# EAGLE board nodeTestPanel (EAGLE 9.0.1), part 1 of 3
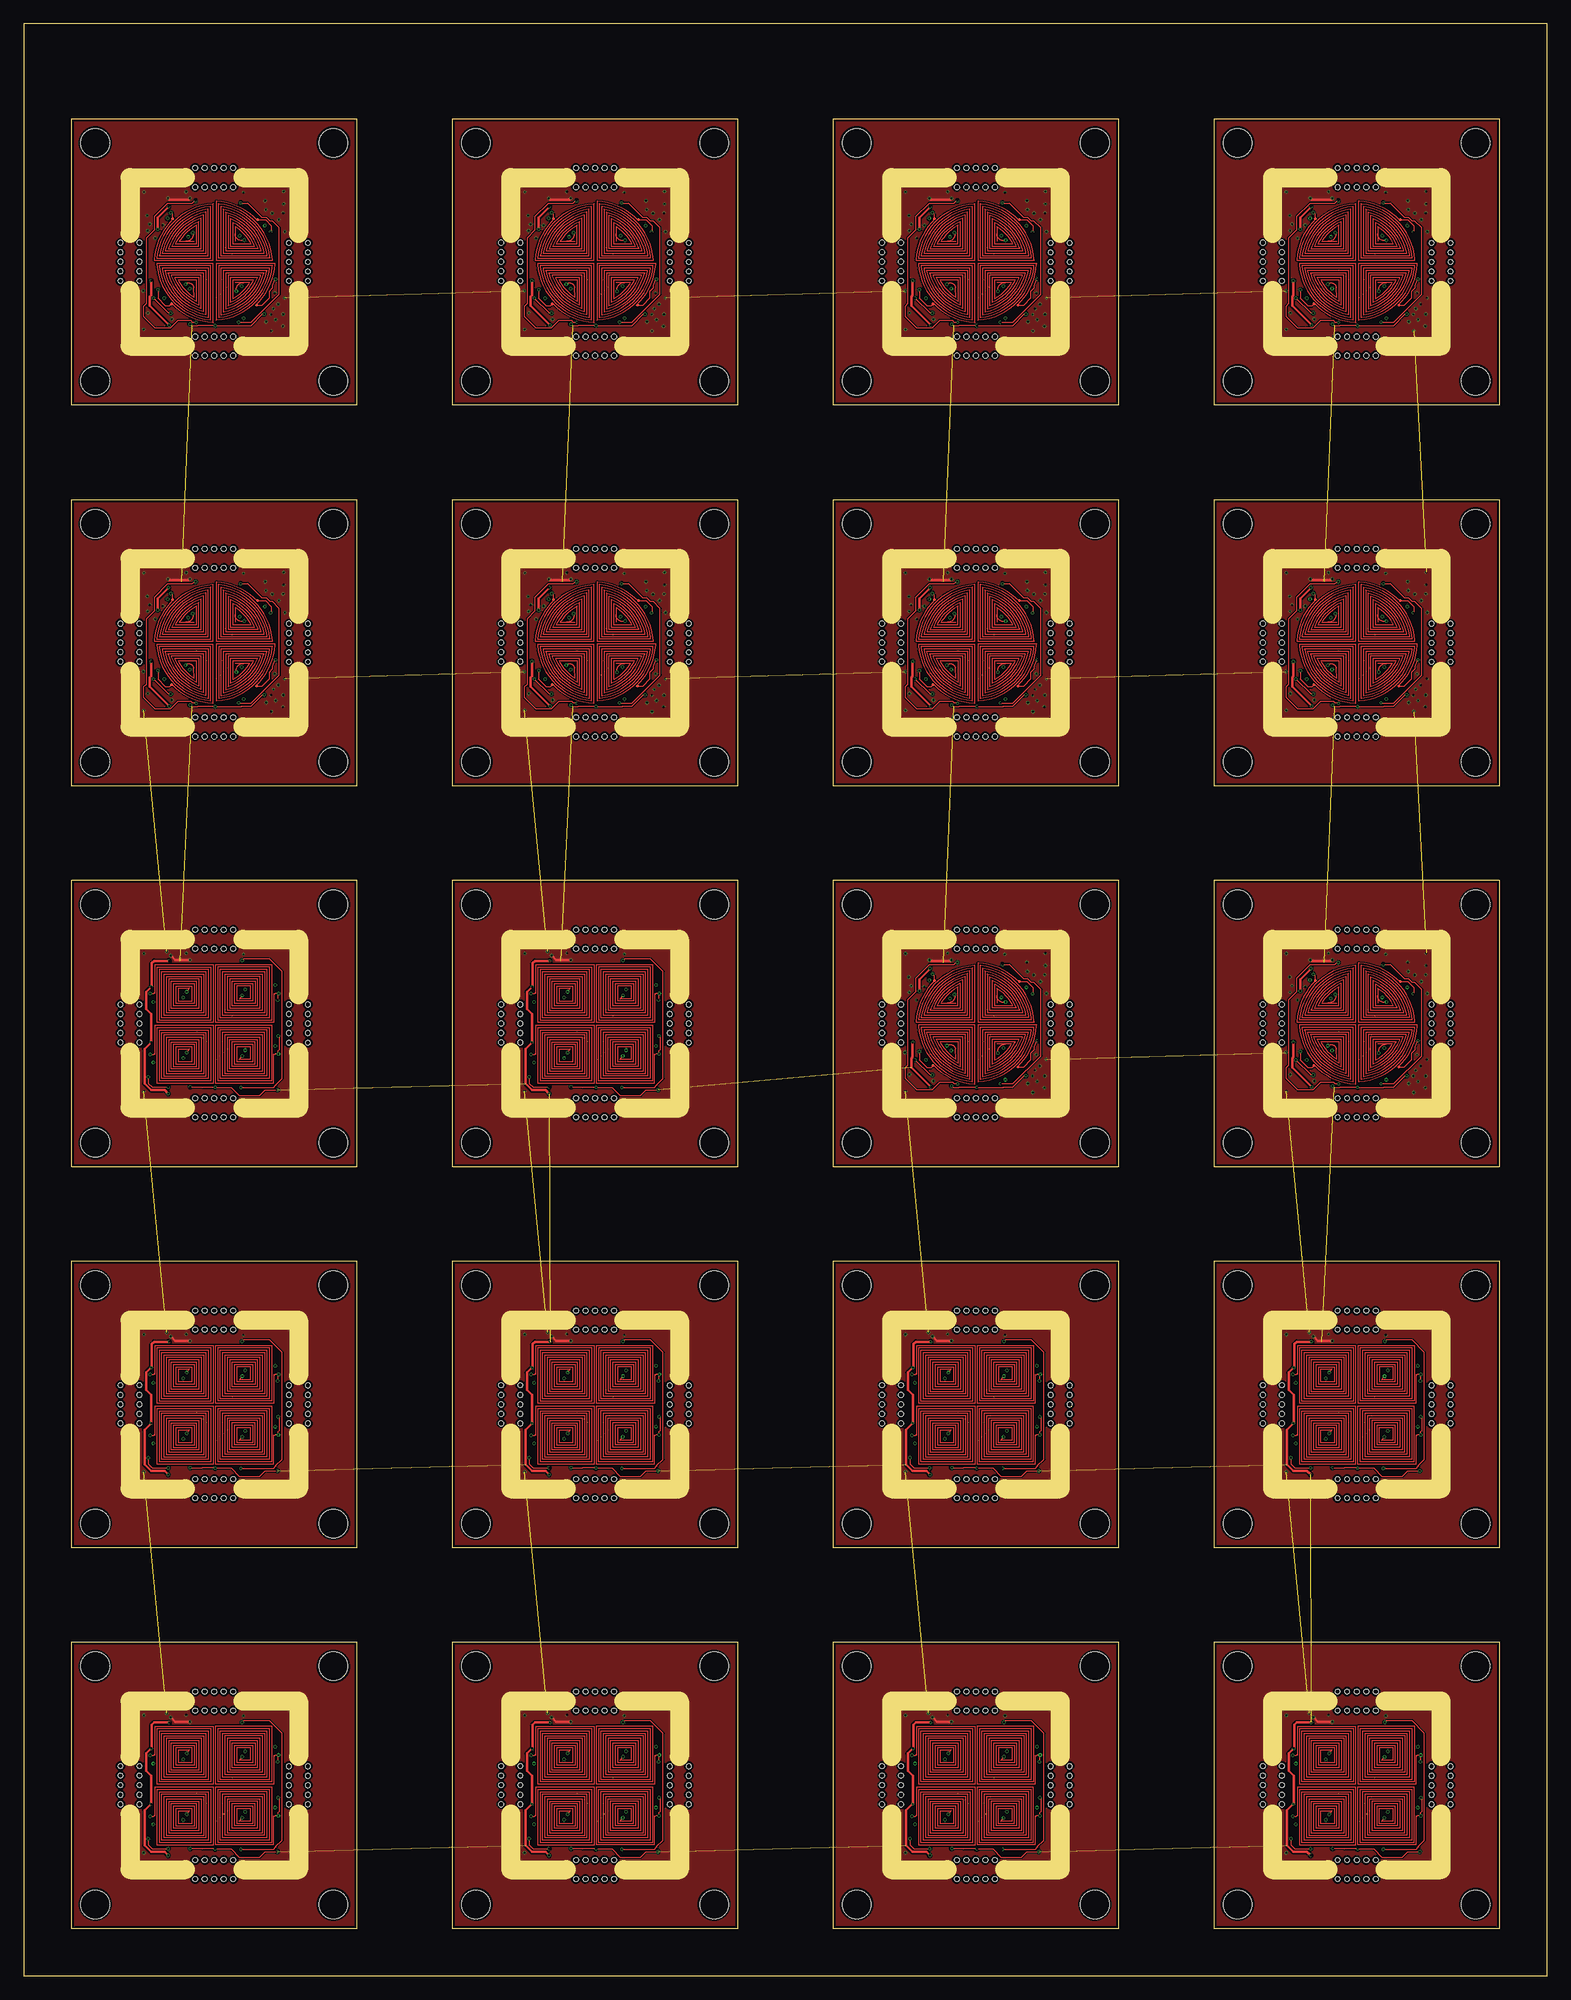
[diagram p0: board, top side]
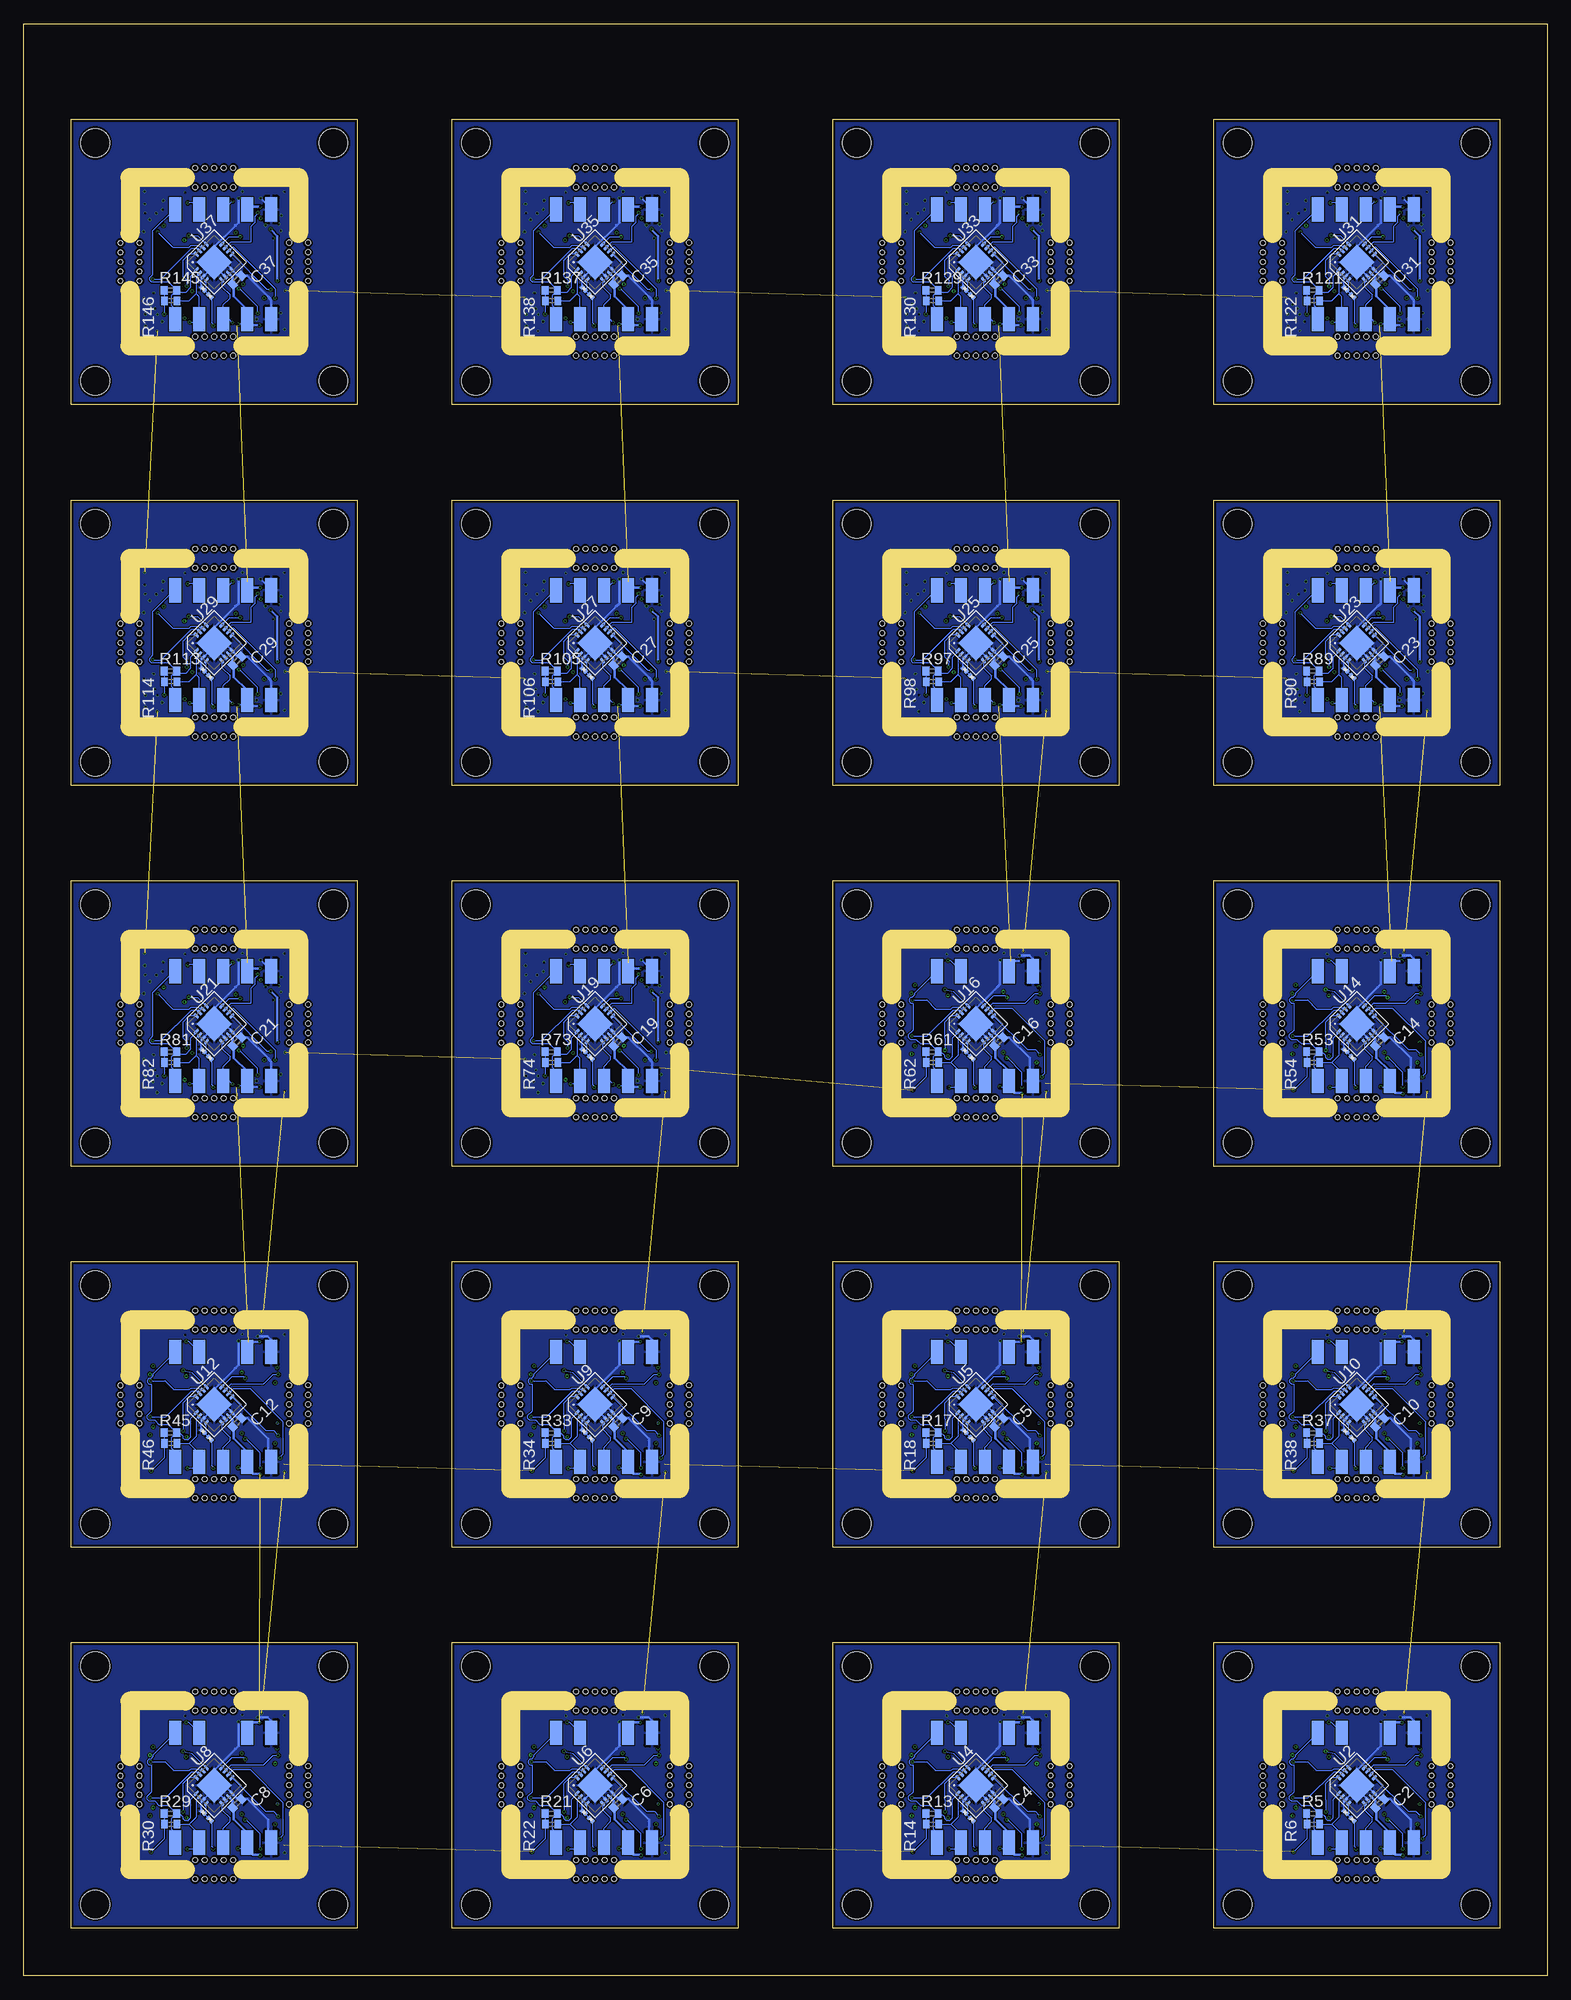
[diagram p1: board, bottom side, seen from below]

Size 160 x 205 mm. Coordinates in mm from the lower left corner, seen from the top.
Outline: 0,0 160,0 160,205 0,205 0,0
Outline: 5,5 35,5 35,35 5,35 5,5
Outline: 45,5 75,5 75,35 45,35 45,5
Outline: 85,5 115,5 115,35 85,35 85,5
Outline: 125,5 155,5 155,35 125,35 125,5
Outline: 5,45 35,45 35,75 5,75 5,45
Outline: 45,45 75,45 75,75 45,75 45,45
Outline: 85,45 115,45 115,75 85,75 85,45
Outline: 125,45 155,45 155,75 125,75 125,45
Outline: 5,85 35,85 35,115 5,115 5,85
Outline: 45,85 75,85 75,115 45,115 45,85
Outline: 85,85 115,85 115,115 85,115 85,85
Outline: 125,85 155,85 155,115 125,115 125,85
Outline: 5,125 35,125 35,155 5,155 5,125
Outline: 45,125 75,125 75,155 45,155 45,125
Outline: 85,125 115,125 115,155 85,155 85,125
Outline: 125,125 155,125 155,155 125,155 125,125
Outline: 5,165 35,165 35,195 5,195 5,165
Outline: 45,165 75,165 75,195 45,195 45,165
Outline: 85,165 115,165 115,195 85,195 85,165
Outline: 125,165 155,165 155,195 125,195 125,165
Copper layers (1*2*15*16): Top 0.035mm / dielectric 1.5mm / Route2 0.035mm / dielectric 0.15mm / Route15 0.035mm / dielectric 0.2mm / Bottom 0.035mm
Design rules "singleNode": minimum track width 0.125mm, minimum drill 0.2mm, track to track 0.125mm, track to pad 0.125mm, pad to pad 0.125mm, via to via 0.125mm, smd to smd 0.125mm, copper to edge 0.25mm, drill to drill 0.45mm, minimum pad ring 0.06mm, minimum via ring 0.05mm, stop-mask expansion 4mil, vias tented up to drill 0mil, thermal gap 10mil
Holes 3 mm at 7.5,7.5 32.5,7.5 7.5,32.5 32.5,32.5 47.5,7.5 72.5,7.5 47.5,32.5 72.5,32.5 87.5,7.5 112.5,7.5 87.5,32.5 112.5,32.5 127.5,7.5 152.5,7.5 127.5,32.5 152.5,32.5 7.5,47.5 32.5,47.5 7.5,72.5 32.5,72.5 47.5,47.5 72.5,47.5 47.5,72.5 72.5,72.5 87.5,47.5 112.5,47.5 87.5,72.5 112.5,72.5 127.5,47.5 152.5,47.5 127.5,72.5 152.5,72.5 7.5,87.5 32.5,87.5 7.5,112.5 32.5,112.5 47.5,87.5 72.5,87.5 47.5,112.5 72.5,112.5 87.5,87.5 112.5,87.5 87.5,112.5 112.5,112.5 127.5,87.5 152.5,87.5 127.5,112.5 152.5,112.5 7.5,127.5 32.5,127.5 7.5,152.5 32.5,152.5 47.5,127.5 72.5,127.5 47.5,152.5 72.5,152.5 87.5,127.5 112.5,127.5 87.5,152.5 112.5,152.5 127.5,127.5 152.5,127.5 127.5,152.5 152.5,152.5 7.5,167.5 32.5,167.5 7.5,192.5 32.5,192.5 47.5,167.5 72.5,167.5 47.5,192.5 72.5,192.5 87.5,167.5 112.5,167.5 87.5,192.5 112.5,192.5 127.5,167.5 152.5,167.5 127.5,192.5 152.5,192.5
Holes 0.5 mm at 18,27.85 19,27.85 20,27.85 21,27.85 22,27.85 18,29.85 19,29.85 20,29.85 21,29.85 22,29.85 12.14,18.01 12.14,19.01 12.14,20.01 12.14,21.01 12.14,22.01 10.14,18.01 10.14,19.01 10.14,20.01 10.14,21.01 10.14,22.01 29.85,18 29.85,19 29.85,20 29.85,21 29.85,22 27.85,18 27.85,19 27.85,20 27.85,21 27.85,22 18,10.15 19,10.15 20,10.15 21,10.15 22,10.15 18,12.15 19,12.15 20,12.15 21,12.15 22,12.15 58,27.85 59,27.85 60,27.85 61,27.85 62,27.85 58,29.85 59,29.85 60,29.85 61,29.85 62,29.85 52.14,18.01 52.14,19.01 52.14,20.01 52.14,21.01 52.14,22.01 50.14,18.01 50.14,19.01 50.14,20.01 50.14,21.01 50.14,22.01 69.85,18 69.85,19 69.85,20 69.85,21 69.85,22 67.85,18 67.85,19 67.85,20 67.85,21 67.85,22 58,10.15 59,10.15 60,10.15 61,10.15 62,10.15 58,12.15 59,12.15 60,12.15 61,12.15 62,12.15 98,27.85 99,27.85 100,27.85 101,27.85 102,27.85 98,29.85 99,29.85 100,29.85 101,29.85 102,29.85 92.14,18.01 92.14,19.01 92.14,20.01 92.14,21.01 92.14,22.01 90.14,18.01 90.14,19.01 90.14,20.01 90.14,21.01 90.14,22.01 109.85,18 109.85,19 109.85,20 109.85,21 109.85,22 107.85,18 107.85,19 107.85,20 107.85,21 107.85,22 98,10.15 99,10.15 100,10.15 101,10.15 102,10.15 98,12.15 99,12.15 100,12.15 101,12.15 102,12.15 138,27.85 139,27.85 140,27.85 141,27.85 142,27.85 138,29.85 139,29.85 140,29.85 141,29.85 142,29.85 132.14,18.01 132.14,19.01 132.14,20.01 132.14,21.01 132.14,22.01 130.14,18.01 130.14,19.01 130.14,20.01 130.14,21.01 130.14,22.01 149.85,18 149.85,19 149.85,20 149.85,21 149.85,22 147.85,18 147.85,19 147.85,20 147.85,21 147.85,22 138,10.15 139,10.15 140,10.15 141,10.15 142,10.15 138,12.15 139,12.15 140,12.15 141,12.15 142,12.15 18,67.85 19,67.85 20,67.85 21,67.85 22,67.85 18,69.85 19,69.85 20,69.85 21,69.85 22,69.85 12.14,58.01 12.14,59.01 12.14,60.01 12.14,61.01 12.14,62.01 10.14,58.01 10.14,59.01 10.14,60.01 10.14,61.01 10.14,62.01 29.85,58 29.85,59 29.85,60 29.85,61 29.85,62 27.85,58 27.85,59 27.85,60 27.85,61 27.85,62 18,50.15 19,50.15 20,50.15 21,50.15 22,50.15 18,52.15 19,52.15 20,52.15 21,52.15 22,52.15 58,67.85 59,67.85 60,67.85 61,67.85 62,67.85 58,69.85 59,69.85 60,69.85 61,69.85 62,69.85 52.14,58.01 52.14,59.01 52.14,60.01 52.14,61.01 52.14,62.01 50.14,58.01 50.14,59.01 50.14,60.01 50.14,61.01 50.14,62.01 69.85,58 69.85,59 69.85,60 69.85,61 69.85,62 67.85,58 67.85,59 67.85,60 67.85,61 67.85,62 58,50.15 59,50.15 60,50.15 61,50.15 62,50.15 58,52.15 59,52.15 60,52.15 61,52.15 62,52.15 98,67.85 99,67.85 100,67.85 101,67.85 102,67.85 98,69.85 99,69.85 100,69.85 101,69.85 102,69.85 92.14,58.01 92.14,59.01 92.14,60.01 92.14,61.01 92.14,62.01 90.14,58.01 90.14,59.01 90.14,60.01 90.14,61.01 90.14,62.01 109.85,58 109.85,59 109.85,60 109.85,61 109.85,62 107.85,58 107.85,59 107.85,60 107.85,61 107.85,62 98,50.15 99,50.15 100,50.15 101,50.15 102,50.15 98,52.15 99,52.15 100,52.15 101,52.15 102,52.15 138,67.85 139,67.85 140,67.85 141,67.85 142,67.85 138,69.85 139,69.85 140,69.85 141,69.85 142,69.85 132.14,58.01 132.14,59.01 132.14,60.01 132.14,61.01 132.14,62.01 130.14,58.01 130.14,59.01 130.14,60.01 130.14,61.01 130.14,62.01 149.85,58 149.85,59 149.85,60 149.85,61 149.85,62 147.85,58 147.85,59 147.85,60 147.85,61 147.85,62 138,50.15 139,50.15 140,50.15 141,50.15 142,50.15 138,52.15 139,52.15 140,52.15 141,52.15 142,52.15 18,107.85 19,107.85 20,107.85 21,107.85 22,107.85 18,109.85 19,109.85 20,109.85 21,109.85 22,109.85 12.14,98.01 12.14,99.01 12.14,100.01 12.14,101.01 12.14,102.01 10.14,98.01 10.14,99.01 10.14,100.01 10.14,101.01 10.14,102.01 29.85,98 29.85,99 29.85,100 29.85,101 29.85,102 27.85,98 27.85,99 27.85,100 27.85,101 27.85,102 18,90.15 19,90.15 20,90.15 21,90.15 22,90.15 18,92.15 19,92.15 20,92.15 21,92.15 22,92.15 58,107.85 59,107.85 60,107.85 61,107.85 62,107.85 58,109.85 59,109.85 60,109.85 61,109.85 62,109.85 52.14,98.01 52.14,99.01 52.14,100.01 52.14,101.01 52.14,102.01 50.14,98.01 50.14,99.01 50.14,100.01 50.14,101.01 50.14,102.01 69.85,98 69.85,99 69.85,100 69.85,101 69.85,102 67.85,98 67.85,99 67.85,100 67.85,101 67.85,102 58,90.15 59,90.15 60,90.15 61,90.15 62,90.15 58,92.15 59,92.15 60,92.15 61,92.15 62,92.15 98,107.85 99,107.85 100,107.85 101,107.85 102,107.85 98,109.85 99,109.85 100,109.85 101,109.85 102,109.85 92.14,98.01 92.14,99.01 92.14,100.01 92.14,101.01 92.14,102.01 90.14,98.01 90.14,99.01 90.14,100.01 90.14,101.01 90.14,102.01 109.85,98 109.85,99 109.85,100 109.85,101 109.85,102 107.85,98 107.85,99 107.85,100 107.85,101 107.85,102 98,90.15 99,90.15 100,90.15 101,90.15 102,90.15 98,92.15 99,92.15 100,92.15 101,92.15 102,92.15 138,107.85 139,107.85 140,107.85 141,107.85 142,107.85 138,109.85 139,109.85 140,109.85 141,109.85 142,109.85 132.14,98.01 132.14,99.01 132.14,100.01 132.14,101.01 132.14,102.01 130.14,98.01 130.14,99.01 130.14,100.01 130.14,101.01 130.14,102.01 149.85,98 149.85,99 149.85,100 149.85,101 149.85,102 147.85,98 147.85,99 147.85,100 147.85,101 147.85,102 138,90.15 139,90.15 140,90.15 141,90.15 142,90.15 138,92.15 139,92.15 140,92.15 141,92.15 142,92.15 18,147.85 19,147.85 20,147.85 21,147.85 22,147.85 18,149.85 19,149.85 20,149.85 21,149.85 22,149.85 12.14,138.01 12.14,139.01 12.14,140.01 12.14,141.01 12.14,142.01 10.14,138.01 10.14,139.01 10.14,140.01 10.14,141.01 10.14,142.01 29.85,138 29.85,139 29.85,140 29.85,141 29.85,142 27.85,138 27.85,139 27.85,140 27.85,141 27.85,142 18,130.15 19,130.15 20,130.15 21,130.15 22,130.15 18,132.15 19,132.15 20,132.15 21,132.15 22,132.15 58,147.85 59,147.85 60,147.85 61,147.85 62,147.85 58,149.85 59,149.85 60,149.85 61,149.85 62,149.85 52.14,138.01 52.14,139.01 52.14,140.01 52.14,141.01 52.14,142.01 50.14,138.01 50.14,139.01 50.14,140.01 50.14,141.01 50.14,142.01 69.85,138 69.85,139 69.85,140 69.85,141 69.85,142 67.85,138 67.85,139 67.85,140 67.85,141 67.85,142 58,130.15 59,130.15 60,130.15 61,130.15 62,130.15 58,132.15 59,132.15 60,132.15 61,132.15 62,132.15 98,147.85 99,147.85 100,147.85 101,147.85 102,147.85 98,149.85 99,149.85 100,149.85 101,149.85 102,149.85 92.14,138.01 92.14,139.01 92.14,140.01 92.14,141.01 92.14,142.01 90.14,138.01 90.14,139.01 90.14,140.01 90.14,141.01 90.14,142.01 109.85,138 109.85,139 109.85,140 109.85,141 109.85,142 107.85,138 107.85,139 107.85,140 107.85,141 107.85,142 98,130.15 99,130.15 100,130.15 101,130.15 102,130.15 98,132.15 99,132.15 100,132.15 101,132.15 102,132.15 138,147.85 139,147.85 140,147.85 141,147.85 142,147.85 138,149.85 139,149.85 140,149.85 141,149.85 142,149.85 132.14,138.01 132.14,139.01 132.14,140.01 132.14,141.01 132.14,142.01 130.14,138.01 130.14,139.01 130.14,140.01 130.14,141.01 130.14,142.01 149.85,138 149.85,139 149.85,140 149.85,141 149.85,142 147.85,138 147.85,139 147.85,140 147.85,141 147.85,142 138,130.15 139,130.15 140,130.15 141,130.15 142,130.15 138,132.15 139,132.15 140,132.15 141,132.15 142,132.15 18,187.85 19,187.85 20,187.85 21,187.85 22,187.85 18,189.85 19,189.85 20,189.85 21,189.85 22,189.85 12.14,178.01 12.14,179.01 12.14,180.01 12.14,181.01 12.14,182.01 10.14,178.01 10.14,179.01 10.14,180.01 10.14,181.01 10.14,182.01 29.85,178 29.85,179 29.85,180 29.85,181 29.85,182 27.85,178 27.85,179 27.85,180 27.85,181 27.85,182 18,170.15 19,170.15 20,170.15 21,170.15 22,170.15 18,172.15 19,172.15 20,172.15 21,172.15 22,172.15 58,187.85 59,187.85 60,187.85 61,187.85 62,187.85 58,189.85 59,189.85 60,189.85 61,189.85 62,189.85 52.14,178.01 52.14,179.01 52.14,180.01 52.14,181.01 52.14,182.01 50.14,178.01 50.14,179.01 50.14,180.01 50.14,181.01 50.14,182.01 69.85,178 69.85,179 69.85,180 69.85,181 69.85,182 67.85,178 67.85,179 67.85,180 67.85,181 67.85,182 58,170.15 59,170.15 60,170.15 61,170.15 62,170.15 58,172.15 59,172.15 60,172.15 61,172.15 62,172.15 98,187.85 99,187.85 100,187.85 101,187.85 102,187.85 98,189.85 99,189.85 100,189.85 101,189.85 102,189.85 92.14,178.01 92.14,179.01 92.14,180.01 92.14,181.01 92.14,182.01 90.14,178.01 90.14,179.01 90.14,180.01 90.14,181.01 90.14,182.01 109.85,178 109.85,179 109.85,180 109.85,181 109.85,182 107.85,178 107.85,179 107.85,180 107.85,181 107.85,182 98,170.15 99,170.15 100,170.15 101,170.15 102,170.15 98,172.15 99,172.15 100,172.15 101,172.15 102,172.15 138,187.85 139,187.85 140,187.85 141,187.85 142,187.85 138,189.85 139,189.85 140,189.85 141,189.85 142,189.85 132.14,178.01 132.14,179.01 132.14,180.01 132.14,181.01 132.14,182.01 130.14,178.01 130.14,179.01 130.14,180.01 130.14,181.01 130.14,182.01 149.85,178 149.85,179 149.85,180 149.85,181 149.85,182 147.85,178 147.85,179 147.85,180 147.85,181 147.85,182 138,170.15 139,170.15 140,170.15 141,170.15 142,170.15 138,172.15 139,172.15 140,172.15 141,172.15 142,172.15
Milling: 160 lines

## Footprints (pad centres in the part's own frame; a part is rotated, then mirrored left to right if it is on the bottom)
C0402 = smd 0.7 x 0.9: 1 -0.65,0; 2 0.65,0
SMD1,27-2,54 = smd 1.27 x 2.54: 1 0,0
R0402 = smd 0.7 x 0.9: 1 -0.65,0; 2 0.65,0
R0201 = smd 0.28 x 0.43: 1 -0.255,0; 2 0.255,0
WQFN-16 = smd 0.6 x 0.25: ADDR -1.9,-0.75; CLIKIN -1.9,-0.25; IN0A 1.9,-0.75; IN0B 1.9,-0.25; IN1A 1.9,0.25; IN1B 1.9,0.75; SCL -1.9,0.75; SDA -1.9,0.25 | smd 2.6 x 2.6: DAP 0,0 | smd 0.25 x 0.6: GND 0.75,-1.9; IN2A 0.75,1.9; IN2B 0.25,1.9; IN3A -0.25,1.9; IN3B -0.75,1.9; INTB -0.75,-1.9; SD -0.25,-1.9; VDD 0.25,-1.9
FAT_SQUARE = drill 0.2 pad 0.3: EXITCOIL0 -3.249,2.762; EXITCOIL1 -3.249,-3.618; EXITCOIL2 3.259,3.588; EXITCOIL3 3.249,-2.782; INCOIL0 -6.73,3.16; INCOIL1 -6.73,-3.22; INCOIL2 6.74,3.19; INCOIL3 6.73,-3.18; INT1_INT2_COIL0 -6.396,2.299; INT1_INT2_COIL1 -6.396,-4.081; INT1_INT2_COIL2 6.406,4.051; INT1_INT2_COIL3 6.396,-2.319; TOP_INT1_COIL0 -2.905,3.36; TOP_INT1_COIL1 -2.905,-3.02; TOP_INT1_COIL2 2.915,2.99; TOP_INT1_COIL3 2.905,-3.38
FAT_FAN = drill 0.2 pad 0.305: EXITCOIL0 -2.74,2.64; EXITCOIL1 -2.6,-2.81; EXITCOIL2B 2.67,2.78; EXITCOIL3 2.89,-2.55; INT1_INT2_COIL0 -4.91,4.6; INT1_INT2_COIL1 -5.26,-3.79; INT1_INT2_COIL2B 5.31,3.83; INT1_INT2_COIL3 3.09,-5.88; TOP_INT1_COIL0 -2.27,3.09; TOP_INT1_COIL1 -3.03,-2.31; TOP_INT1_COIL3 2.32,-3.06; TOP_INT1_COIL12B 3.12,2.3 | smd 0.25 x 0.25: INCOIL0 -4.37,4.56; INCOIL1 -4.5,-4.4; INCOIL2B 4.57,4.43; INCOIL3 4.43,-4.54

## Placement (x,y rotation side)
C2  10uF  [C0402]  17.6,18.1 45 bottom
C4  10uF  [C0402]  57.6,18.1 45 bottom
C5  10uF  [C0402]  57.6,58.1 45 bottom
C6  10uF  [C0402]  97.6,18.1 45 bottom
C8  10uF  [C0402]  137.6,18.1 45 bottom
C9  10uF  [C0402]  97.6,58.1 45 bottom
C10  10uF  [C0402]  17.6,58.1 45 bottom
C12  10uF  [C0402]  137.6,58.1 45 bottom
C14  10uF  [C0402]  17.6,98.1 45 bottom
C16  10uF  [C0402]  57.6,98.1 45 bottom
C19  10uF  [C0402]  97.6,98.1 45 bottom
C21  10uF  [C0402]  137.6,98.1 45 bottom
C23  10uF  [C0402]  17.6,138.1 45 bottom
C25  10uF  [C0402]  57.6,138.1 45 bottom
C27  10uF  [C0402]  97.6,138.1 45 bottom
C29  10uF  [C0402]  137.6,138.1 45 bottom
C31  10uF  [C0402]  17.6,178.1 45 bottom
C33  10uF  [C0402]  57.6,178.1 45 bottom
C35  10uF  [C0402]  97.6,178.1 45 bottom
C37  10uF  [C0402]  137.6,178.1 45 bottom
PAD8  WIREPADSMD1,27-254  [SMD1,27-2,54]  16.53,13.98 180 bottom
PAD11  WIREPADSMD1,27-254  [SMD1,27-2,54]  14.01,13.98 180 bottom
PAD12  WIREPADSMD1,27-254  [SMD1,27-2,54]  19.05,13.98 0 bottom
PAD13  WIREPADSMD1,27-254  [SMD1,27-2,54]  21.57,13.98 0 bottom
PAD14  WIREPADSMD1,27-254  [SMD1,27-2,54]  24.09,13.98 0 bottom
PAD15  WIREPADSMD1,27-254  [SMD1,27-2,54]  16.53,25.5 0 bottom
PAD16  WIREPADSMD1,27-254  [SMD1,27-2,54]  14.01,25.5 0 bottom
PAD17  WIREPADSMD1,27-254  [SMD1,27-2,54]  21.57,25.5 0 bottom
PAD18  WIREPADSMD1,27-254  [SMD1,27-2,54]  24.09,25.5 0 bottom
PAD28  WIREPADSMD1,27-254  [SMD1,27-2,54]  56.53,13.98 180 bottom
PAD29  WIREPADSMD1,27-254  [SMD1,27-2,54]  54.01,13.98 180 bottom
PAD30  WIREPADSMD1,27-254  [SMD1,27-2,54]  59.05,13.98 0 bottom
PAD31  WIREPADSMD1,27-254  [SMD1,27-2,54]  61.57,13.98 0 bottom
PAD32  WIREPADSMD1,27-254  [SMD1,27-2,54]  64.09,13.98 0 bottom
PAD33  WIREPADSMD1,27-254  [SMD1,27-2,54]  56.53,25.5 0 bottom
PAD34  WIREPADSMD1,27-254  [SMD1,27-2,54]  54.01,25.5 0 bottom
PAD35  WIREPADSMD1,27-254  [SMD1,27-2,54]  61.57,25.5 0 bottom
PAD36  WIREPADSMD1,27-254  [SMD1,27-2,54]  64.09,25.5 0 bottom
PAD37  WIREPADSMD1,27-254  [SMD1,27-2,54]  56.53,53.98 180 bottom
PAD38  WIREPADSMD1,27-254  [SMD1,27-2,54]  54.01,53.98 180 bottom
PAD39  WIREPADSMD1,27-254  [SMD1,27-2,54]  59.05,53.98 0 bottom
PAD40  WIREPADSMD1,27-254  [SMD1,27-2,54]  61.57,53.98 0 bottom
PAD41  WIREPADSMD1,27-254  [SMD1,27-2,54]  64.09,53.98 0 bottom
PAD42  WIREPADSMD1,27-254  [SMD1,27-2,54]  56.53,65.5 0 bottom
PAD43  WIREPADSMD1,27-254  [SMD1,27-2,54]  54.01,65.5 0 bottom
PAD44  WIREPADSMD1,27-254  [SMD1,27-2,54]  61.57,65.5 0 bottom
PAD45  WIREPADSMD1,27-254  [SMD1,27-2,54]  64.09,65.5 0 bottom
PAD46  WIREPADSMD1,27-254  [SMD1,27-2,54]  96.53,13.98 180 bottom
PAD47  WIREPADSMD1,27-254  [SMD1,27-2,54]  94.01,13.98 180 bottom
PAD48  WIREPADSMD1,27-254  [SMD1,27-2,54]  99.05,13.98 0 bottom
PAD49  WIREPADSMD1,27-254  [SMD1,27-2,54]  101.57,13.98 0 bottom
PAD50  WIREPADSMD1,27-254  [SMD1,27-2,54]  104.09,13.98 0 bottom
PAD51  WIREPADSMD1,27-254  [SMD1,27-2,54]  96.53,25.5 0 bottom
PAD52  WIREPADSMD1,27-254  [SMD1,27-2,54]  94.01,25.5 0 bottom
PAD53  WIREPADSMD1,27-254  [SMD1,27-2,54]  101.57,25.5 0 bottom
PAD54  WIREPADSMD1,27-254  [SMD1,27-2,54]  104.09,25.5 0 bottom
PAD64  WIREPADSMD1,27-254  [SMD1,27-2,54]  136.53,13.98 180 bottom
PAD65  WIREPADSMD1,27-254  [SMD1,27-2,54]  134.01,13.98 180 bottom
PAD66  WIREPADSMD1,27-254  [SMD1,27-2,54]  139.05,13.98 0 bottom
PAD67  WIREPADSMD1,27-254  [SMD1,27-2,54]  141.57,13.98 0 bottom
PAD68  WIREPADSMD1,27-254  [SMD1,27-2,54]  144.09,13.98 0 bottom
PAD69  WIREPADSMD1,27-254  [SMD1,27-2,54]  136.53,25.5 0 bottom
PAD70  WIREPADSMD1,27-254  [SMD1,27-2,54]  134.01,25.5 0 bottom
PAD71  WIREPADSMD1,27-254  [SMD1,27-2,54]  141.57,25.5 0 bottom
PAD72  WIREPADSMD1,27-254  [SMD1,27-2,54]  144.09,25.5 0 bottom
PAD73  WIREPADSMD1,27-254  [SMD1,27-2,54]  96.53,53.98 180 bottom
PAD74  WIREPADSMD1,27-254  [SMD1,27-2,54]  94.01,53.98 180 bottom
PAD75  WIREPADSMD1,27-254  [SMD1,27-2,54]  99.05,53.98 0 bottom
PAD76  WIREPADSMD1,27-254  [SMD1,27-2,54]  101.57,53.98 0 bottom
PAD77  WIREPADSMD1,27-254  [SMD1,27-2,54]  104.09,53.98 0 bottom
PAD78  WIREPADSMD1,27-254  [SMD1,27-2,54]  96.53,65.5 0 bottom
PAD79  WIREPADSMD1,27-254  [SMD1,27-2,54]  94.01,65.5 0 bottom
PAD80  WIREPADSMD1,27-254  [SMD1,27-2,54]  101.57,65.5 0 bottom
PAD81  WIREPADSMD1,27-254  [SMD1,27-2,54]  104.09,65.5 0 bottom
PAD82  WIREPADSMD1,27-254  [SMD1,27-2,54]  16.53,53.98 180 bottom
PAD83  WIREPADSMD1,27-254  [SMD1,27-2,54]  14.01,53.98 180 bottom
PAD84  WIREPADSMD1,27-254  [SMD1,27-2,54]  19.05,53.98 0 bottom
PAD85  WIREPADSMD1,27-254  [SMD1,27-2,54]  21.57,53.98 0 bottom
PAD86  WIREPADSMD1,27-254  [SMD1,27-2,54]  24.09,53.98 0 bottom
PAD87  WIREPADSMD1,27-254  [SMD1,27-2,54]  16.53,65.5 0 bottom
PAD88  WIREPADSMD1,27-254  [SMD1,27-2,54]  14.01,65.5 0 bottom
PAD89  WIREPADSMD1,27-254  [SMD1,27-2,54]  21.57,65.5 0 bottom
PAD90  WIREPADSMD1,27-254  [SMD1,27-2,54]  24.09,65.5 0 bottom
PAD100  WIREPADSMD1,27-254  [SMD1,27-2,54]  136.53,53.98 180 bottom
PAD101  WIREPADSMD1,27-254  [SMD1,27-2,54]  134.01,53.98 180 bottom
PAD102  WIREPADSMD1,27-254  [SMD1,27-2,54]  139.05,53.98 0 bottom
PAD103  WIREPADSMD1,27-254  [SMD1,27-2,54]  141.57,53.98 0 bottom
PAD104  WIREPADSMD1,27-254  [SMD1,27-2,54]  144.09,53.98 0 bottom
PAD105  WIREPADSMD1,27-254  [SMD1,27-2,54]  136.53,65.5 0 bottom
PAD106  WIREPADSMD1,27-254  [SMD1,27-2,54]  134.01,65.5 0 bottom
PAD107  WIREPADSMD1,27-254  [SMD1,27-2,54]  141.57,65.5 0 bottom
PAD108  WIREPADSMD1,27-254  [SMD1,27-2,54]  144.09,65.5 0 bottom
PAD118  WIREPADSMD1,27-254  [SMD1,27-2,54]  16.53,93.98 180 bottom
PAD119  WIREPADSMD1,27-254  [SMD1,27-2,54]  14.01,93.98 180 bottom
PAD120  WIREPADSMD1,27-254  [SMD1,27-2,54]  19.05,93.98 0 bottom
PAD121  WIREPADSMD1,27-254  [SMD1,27-2,54]  21.57,93.98 0 bottom
PAD122  WIREPADSMD1,27-254  [SMD1,27-2,54]  24.09,93.98 0 bottom
PAD123  WIREPADSMD1,27-254  [SMD1,27-2,54]  16.53,105.5 0 bottom
PAD124  WIREPADSMD1,27-254  [SMD1,27-2,54]  14.01,105.5 0 bottom
PAD125  WIREPADSMD1,27-254  [SMD1,27-2,54]  21.57,105.5 0 bottom
PAD126  WIREPADSMD1,27-254  [SMD1,27-2,54]  24.09,105.5 0 bottom
PAD136  WIREPADSMD1,27-254  [SMD1,27-2,54]  56.53,93.98 180 bottom
PAD137  WIREPADSMD1,27-254  [SMD1,27-2,54]  54.01,93.98 180 bottom
PAD138  WIREPADSMD1,27-254  [SMD1,27-2,54]  59.05,93.98 0 bottom
PAD139  WIREPADSMD1,27-254  [SMD1,27-2,54]  61.57,93.98 0 bottom
PAD140  WIREPADSMD1,27-254  [SMD1,27-2,54]  64.09,93.98 0 bottom
PAD141  WIREPADSMD1,27-254  [SMD1,27-2,54]  56.53,105.5 0 bottom
PAD142  WIREPADSMD1,27-254  [SMD1,27-2,54]  54.01,105.5 0 bottom
PAD143  WIREPADSMD1,27-254  [SMD1,27-2,54]  61.57,105.5 0 bottom
PAD144  WIREPADSMD1,27-254  [SMD1,27-2,54]  64.09,105.5 0 bottom
PAD165  WIREPADSMD1,27-254  [SMD1,27-2,54]  96.53,93.98 180 bottom
PAD166  WIREPADSMD1,27-254  [SMD1,27-2,54]  94.01,93.98 180 bottom
PAD167  WIREPADSMD1,27-254  [SMD1,27-2,54]  99.05,93.98 0 bottom
PAD168  WIREPADSMD1,27-254  [SMD1,27-2,54]  101.57,93.98 0 bottom
PAD169  WIREPADSMD1,27-254  [SMD1,27-2,54]  104.09,93.98 0 bottom
PAD170  WIREPADSMD1,27-254  [SMD1,27-2,54]  96.53,105.5 0 bottom
PAD171  WIREPADSMD1,27-254  [SMD1,27-2,54]  94.01,105.5 0 bottom
PAD172  WIREPADSMD1,27-254  [SMD1,27-2,54]  99.05,105.5 0 bottom
PAD173  WIREPADSMD1,27-254  [SMD1,27-2,54]  101.57,105.5 0 bottom
PAD174  WIREPADSMD1,27-254  [SMD1,27-2,54]  104.09,105.5 0 bottom
PAD185  WIREPADSMD1,27-254  [SMD1,27-2,54]  136.53,93.98 180 bottom
PAD186  WIREPADSMD1,27-254  [SMD1,27-2,54]  134.01,93.98 180 bottom
PAD187  WIREPADSMD1,27-254  [SMD1,27-2,54]  139.05,93.98 0 bottom
PAD188  WIREPADSMD1,27-254  [SMD1,27-2,54]  141.57,93.98 0 bottom
PAD189  WIREPADSMD1,27-254  [SMD1,27-2,54]  144.09,93.98 0 bottom
PAD190  WIREPADSMD1,27-254  [SMD1,27-2,54]  136.53,105.5 0 bottom
PAD191  WIREPADSMD1,27-254  [SMD1,27-2,54]  134.01,105.5 0 bottom
PAD192  WIREPADSMD1,27-254  [SMD1,27-2,54]  139.05,105.5 0 bottom
PAD193  WIREPADSMD1,27-254  [SMD1,27-2,54]  141.57,105.5 0 bottom
PAD194  WIREPADSMD1,27-254  [SMD1,27-2,54]  144.09,105.5 0 bottom
PAD205  WIREPADSMD1,27-254  [SMD1,27-2,54]  16.53,133.98 180 bottom
PAD206  WIREPADSMD1,27-254  [SMD1,27-2,54]  14.01,133.98 180 bottom
PAD207  WIREPADSMD1,27-254  [SMD1,27-2,54]  19.05,133.98 0 bottom
PAD208  WIREPADSMD1,27-254  [SMD1,27-2,54]  21.57,133.98 0 bottom
PAD209  WIREPADSMD1,27-254  [SMD1,27-2,54]  24.09,133.98 0 bottom
PAD210  WIREPADSMD1,27-254  [SMD1,27-2,54]  16.53,145.5 0 bottom
PAD211  WIREPADSMD1,27-254  [SMD1,27-2,54]  14.01,145.5 0 bottom
PAD212  WIREPADSMD1,27-254  [SMD1,27-2,54]  19.05,145.5 0 bottom
PAD213  WIREPADSMD1,27-254  [SMD1,27-2,54]  21.57,145.5 0 bottom
PAD214  WIREPADSMD1,27-254  [SMD1,27-2,54]  24.09,145.5 0 bottom
PAD225  WIREPADSMD1,27-254  [SMD1,27-2,54]  56.53,133.98 180 bottom
PAD226  WIREPADSMD1,27-254  [SMD1,27-2,54]  54.01,133.98 180 bottom
PAD227  WIREPADSMD1,27-254  [SMD1,27-2,54]  59.05,133.98 0 bottom
PAD228  WIREPADSMD1,27-254  [SMD1,27-2,54]  61.57,133.98 0 bottom
PAD229  WIREPADSMD1,27-254  [SMD1,27-2,54]  64.09,133.98 0 bottom
PAD230  WIREPADSMD1,27-254  [SMD1,27-2,54]  56.53,145.5 0 bottom
PAD231  WIREPADSMD1,27-254  [SMD1,27-2,54]  54.01,145.5 0 bottom
PAD232  WIREPADSMD1,27-254  [SMD1,27-2,54]  59.05,145.5 0 bottom
PAD233  WIREPADSMD1,27-254  [SMD1,27-2,54]  61.57,145.5 0 bottom
PAD234  WIREPADSMD1,27-254  [SMD1,27-2,54]  64.09,145.5 0 bottom
PAD245  WIREPADSMD1,27-254  [SMD1,27-2,54]  96.53,133.98 180 bottom
PAD246  WIREPADSMD1,27-254  [SMD1,27-2,54]  94.01,133.98 180 bottom
PAD247  WIREPADSMD1,27-254  [SMD1,27-2,54]  99.05,133.98 0 bottom
PAD248  WIREPADSMD1,27-254  [SMD1,27-2,54]  101.57,133.98 0 bottom
PAD249  WIREPADSMD1,27-254  [SMD1,27-2,54]  104.09,133.98 0 bottom
PAD250  WIREPADSMD1,27-254  [SMD1,27-2,54]  96.53,145.5 0 bottom
PAD251  WIREPADSMD1,27-254  [SMD1,27-2,54]  94.01,145.5 0 bottom
PAD252  WIREPADSMD1,27-254  [SMD1,27-2,54]  99.05,145.5 0 bottom
PAD253  WIREPADSMD1,27-254  [SMD1,27-2,54]  101.57,145.5 0 bottom
PAD254  WIREPADSMD1,27-254  [SMD1,27-2,54]  104.09,145.5 0 bottom
PAD265  WIREPADSMD1,27-254  [SMD1,27-2,54]  136.53,133.98 180 bottom
PAD266  WIREPADSMD1,27-254  [SMD1,27-2,54]  134.01,133.98 180 bottom
PAD267  WIREPADSMD1,27-254  [SMD1,27-2,54]  139.05,133.98 0 bottom
PAD268  WIREPADSMD1,27-254  [SMD1,27-2,54]  141.57,133.98 0 bottom
PAD269  WIREPADSMD1,27-254  [SMD1,27-2,54]  144.09,133.98 0 bottom
PAD270  WIREPADSMD1,27-254  [SMD1,27-2,54]  136.53,145.5 0 bottom
PAD271  WIREPADSMD1,27-254  [SMD1,27-2,54]  134.01,145.5 0 bottom
PAD272  WIREPADSMD1,27-254  [SMD1,27-2,54]  139.05,145.5 0 bottom
PAD273  WIREPADSMD1,27-254  [SMD1,27-2,54]  141.57,145.5 0 bottom
PAD274  WIREPADSMD1,27-254  [SMD1,27-2,54]  144.09,145.5 0 bottom
PAD285  WIREPADSMD1,27-254  [SMD1,27-2,54]  16.53,173.98 180 bottom
PAD286  WIREPADSMD1,27-254  [SMD1,27-2,54]  14.01,173.98 180 bottom
PAD287  WIREPADSMD1,27-254  [SMD1,27-2,54]  19.05,173.98 0 bottom
PAD288  WIREPADSMD1,27-254  [SMD1,27-2,54]  21.57,173.98 0 bottom
PAD289  WIREPADSMD1,27-254  [SMD1,27-2,54]  24.09,173.98 0 bottom
PAD290  WIREPADSMD1,27-254  [SMD1,27-2,54]  16.53,185.5 0 bottom
PAD291  WIREPADSMD1,27-254  [SMD1,27-2,54]  14.01,185.5 0 bottom
PAD292  WIREPADSMD1,27-254  [SMD1,27-2,54]  19.05,185.5 0 bottom
PAD293  WIREPADSMD1,27-254  [SMD1,27-2,54]  21.57,185.5 0 bottom
PAD294  WIREPADSMD1,27-254  [SMD1,27-2,54]  24.09,185.5 0 bottom
PAD305  WIREPADSMD1,27-254  [SMD1,27-2,54]  56.53,173.98 180 bottom
PAD306  WIREPADSMD1,27-254  [SMD1,27-2,54]  54.01,173.98 180 bottom
PAD307  WIREPADSMD1,27-254  [SMD1,27-2,54]  59.05,173.98 0 bottom
PAD308  WIREPADSMD1,27-254  [SMD1,27-2,54]  61.57,173.98 0 bottom
PAD309  WIREPADSMD1,27-254  [SMD1,27-2,54]  64.09,173.98 0 bottom
PAD310  WIREPADSMD1,27-254  [SMD1,27-2,54]  56.53,185.5 0 bottom
PAD311  WIREPADSMD1,27-254  [SMD1,27-2,54]  54.01,185.5 0 bottom
PAD312  WIREPADSMD1,27-254  [SMD1,27-2,54]  59.05,185.5 0 bottom
PAD313  WIREPADSMD1,27-254  [SMD1,27-2,54]  61.57,185.5 0 bottom
PAD314  WIREPADSMD1,27-254  [SMD1,27-2,54]  64.09,185.5 0 bottom
PAD325  WIREPADSMD1,27-254  [SMD1,27-2,54]  96.53,173.98 180 bottom
PAD326  WIREPADSMD1,27-254  [SMD1,27-2,54]  94.01,173.98 180 bottom
PAD327  WIREPADSMD1,27-254  [SMD1,27-2,54]  99.05,173.98 0 bottom
PAD328  WIREPADSMD1,27-254  [SMD1,27-2,54]  101.57,173.98 0 bottom
PAD329  WIREPADSMD1,27-254  [SMD1,27-2,54]  104.09,173.98 0 bottom
PAD330  WIREPADSMD1,27-254  [SMD1,27-2,54]  96.53,185.5 0 bottom
PAD331  WIREPADSMD1,27-254  [SMD1,27-2,54]  94.01,185.5 0 bottom
PAD332  WIREPADSMD1,27-254  [SMD1,27-2,54]  99.05,185.5 0 bottom
PAD333  WIREPADSMD1,27-254  [SMD1,27-2,54]  101.57,185.5 0 bottom
PAD334  WIREPADSMD1,27-254  [SMD1,27-2,54]  104.09,185.5 0 bottom
PAD345  WIREPADSMD1,27-254  [SMD1,27-2,54]  136.53,173.98 180 bottom
PAD346  WIREPADSMD1,27-254  [SMD1,27-2,54]  134.01,173.98 180 bottom
PAD347  WIREPADSMD1,27-254  [SMD1,27-2,54]  139.05,173.98 0 bottom
PAD348  WIREPADSMD1,27-254  [SMD1,27-2,54]  141.57,173.98 0 bottom
PAD349  WIREPADSMD1,27-254  [SMD1,27-2,54]  144.09,173.98 0 bottom
PAD350  WIREPADSMD1,27-254  [SMD1,27-2,54]  136.53,185.5 0 bottom
PAD351  WIREPADSMD1,27-254  [SMD1,27-2,54]  134.01,185.5 0 bottom
PAD352  WIREPADSMD1,27-254  [SMD1,27-2,54]  139.05,185.5 0 bottom
PAD353  WIREPADSMD1,27-254  [SMD1,27-2,54]  141.57,185.5 0 bottom
PAD354  WIREPADSMD1,27-254  [SMD1,27-2,54]  144.09,185.5 0 bottom
R5  10k  [R0402]  24.6,17.02 180 bottom
R6  10k  [R0402]  24.56,15.91 180 bottom
R7  NOFIT  [R0201]  20.44,16.41 315 bottom
R8  NOFIT  [R0201]  21.17,17.16 315 bottom
R13  10k  [R0402]  64.6,17.02 180 bottom
R14  10k  [R0402]  64.56,15.91 180 bottom
R15  NOFIT  [R0201]  60.44,16.41 315 bottom
R16  NOFIT  [R0201]  61.17,17.16 315 bottom
R17  10k  [R0402]  64.6,57.02 180 bottom
R18  10k  [R0402]  64.56,55.91 180 bottom
R19  NOFIT  [R0201]  60.44,56.41 315 bottom
R20  NOFIT  [R0201]  61.17,57.16 315 bottom
R21  10k  [R0402]  104.6,17.02 180 bottom
R22  10k  [R0402]  104.56,15.91 180 bottom
R23  NOFIT  [R0201]  100.44,16.41 315 bottom
R24  NOFIT  [R0201]  101.17,17.16 315 bottom
R29  10k  [R0402]  144.6,17.02 180 bottom
R30  10k  [R0402]  144.56,15.91 180 bottom
R31  NOFIT  [R0201]  140.44,16.41 315 bottom
R32  NOFIT  [R0201]  141.17,17.16 315 bottom
R33  10k  [R0402]  104.6,57.02 180 bottom
R34  10k  [R0402]  104.56,55.91 180 bottom
R35  NOFIT  [R0201]  100.44,56.41 315 bottom
R36  NOFIT  [R0201]  101.17,57.16 315 bottom
R37  10k  [R0402]  24.6,57.02 180 bottom
R38  10k  [R0402]  24.56,55.91 180 bottom
R39  NOFIT  [R0201]  20.44,56.41 315 bottom
R40  NOFIT  [R0201]  21.17,57.16 315 bottom
R45  10k  [R0402]  144.6,57.02 180 bottom
R46  10k  [R0402]  144.56,55.91 180 bottom
R47  NOFIT  [R0201]  140.44,56.41 315 bottom
R48  NOFIT  [R0201]  141.17,57.16 315 bottom
R53  10k  [R0402]  24.6,97.02 180 bottom
R54  10k  [R0402]  24.56,95.91 180 bottom
R55  NOFIT  [R0201]  20.44,96.41 315 bottom
R56  NOFIT  [R0201]  21.17,97.16 315 bottom
R61  10k  [R0402]  64.6,97.02 180 bottom
R62  10k  [R0402]  64.56,95.91 180 bottom
R63  NOFIT  [R0201]  60.44,96.41 315 bottom
R64  NOFIT  [R0201]  61.17,97.16 315 bottom
R73  10k  [R0402]  104.6,97.02 180 bottom
R74  10k  [R0402]  104.56,95.91 180 bottom
R75  NOFIT  [R0201]  100.44,96.41 315 bottom
R76  NOFIT  [R0201]  101.17,97.16 315 bottom
R81  10k  [R0402]  144.6,97.02 180 bottom
R82  10k  [R0402]  144.56,95.91 180 bottom
R83  NOFIT  [R0201]  140.44,96.41 315 bottom
R84  NOFIT  [R0201]  141.17,97.16 315 bottom
R89  10k  [R0402]  24.6,137.02 180 bottom
R90  10k  [R0402]  24.56,135.91 180 bottom
R91  NOFIT  [R0201]  20.44,136.41 315 bottom
R92  NOFIT  [R0201]  21.17,137.16 315 bottom
R97  10k  [R0402]  64.6,137.02 180 bottom
R98  10k  [R0402]  64.56,135.91 180 bottom
R99  NOFIT  [R0201]  60.44,136.41 315 bottom
R100  NOFIT  [R0201]  61.17,137.16 315 bottom
R105  10k  [R0402]  104.6,137.02 180 bottom
R106  10k  [R0402]  104.56,135.91 180 bottom
R107  NOFIT  [R0201]  100.44,136.41 315 bottom
R108  NOFIT  [R0201]  101.17,137.16 315 bottom
R113  10k  [R0402]  144.6,137.02 180 bottom
R114  10k  [R0402]  144.56,135.91 180 bottom
R115  NOFIT  [R0201]  140.44,136.41 315 bottom
R116  NOFIT  [R0201]  141.17,137.16 315 bottom
R121  10k  [R0402]  24.6,177.02 180 bottom
R122  10k  [R0402]  24.56,175.91 180 bottom
R123  NOFIT  [R0201]  20.44,176.41 315 bottom
R124  NOFIT  [R0201]  21.17,177.16 315 bottom
R129  10k  [R0402]  64.6,177.02 180 bottom
R130  10k  [R0402]  64.56,175.91 180 bottom
R131  NOFIT  [R0201]  60.44,176.41 315 bottom
R132  NOFIT  [R0201]  61.17,177.16 315 bottom
R137  10k  [R0402]  104.6,177.02 180 bottom
R138  10k  [R0402]  104.56,175.91 180 bottom
R139  NOFIT  [R0201]  100.44,176.41 315 bottom
R140  NOFIT  [R0201]  101.17,177.16 315 bottom
R145  10k  [R0402]  144.6,177.02 180 bottom
R146  10k  [R0402]  144.56,175.91 180 bottom
R147  NOFIT  [R0201]  140.44,176.41 315 bottom
R148  NOFIT  [R0201]  141.17,177.16 315 bottom
U2  LDC1614  [WQFN-16]  20.01,19.98 45 bottom
U4  LDC1614  [WQFN-16]  60.01,19.98 45 bottom
U5  LDC1614  [WQFN-16]  60.01,59.98 45 bottom
U6  LDC1614  [WQFN-16]  100.01,19.98 45 bottom
U8  LDC1614  [WQFN-16]  140.01,19.98 45 bottom
U9  LDC1614  [WQFN-16]  100.01,59.98 45 bottom
U10  LDC1614  [WQFN-16]  20.01,59.98 45 bottom
U12  LDC1614  [WQFN-16]  140.01,59.98 45 bottom
U14  LDC1614  [WQFN-16]  20.01,99.98 45 bottom
U16  LDC1614  [WQFN-16]  60.01,99.98 45 bottom
U19  LDC1614  [WQFN-16]  100.01,99.98 45 bottom
U21  LDC1614  [WQFN-16]  140.01,99.98 45 bottom
U23  LDC1614  [WQFN-16]  20.01,139.98 45 bottom
U25  LDC1614  [WQFN-16]  60.01,139.98 45 bottom
U27  LDC1614  [WQFN-16]  100.01,139.98 45 bottom
U29  LDC1614  [WQFN-16]  140.01,139.98 45 bottom
U31  LDC1614  [WQFN-16]  20.01,179.98 45 bottom
U33  LDC1614  [WQFN-16]  60.01,179.98 45 bottom
U35  LDC1614  [WQFN-16]  100.01,179.98 45 bottom
U37  LDC1614  [WQFN-16]  140.01,179.98 45 bottom
U$1  FATSQUARE_GROUP  [FAT_SQUARE]  20.01,19.98 0 top
U$4  FATSQUARE_GROUP  [FAT_SQUARE]  60.01,19.98 0 top
U$5  FATSQUARE_GROUP  [FAT_SQUARE]  60.01,59.98 0 top
U$6  FATSQUARE_GROUP  [FAT_SQUARE]  100.01,19.98 0 top
U$8  FATSQUARE_GROUP  [FAT_SQUARE]  140.01,19.98 0 top
U$9  FATSQUARE_GROUP  [FAT_SQUARE]  100.01,59.98 0 top
U$10  FATSQUARE_GROUP  [FAT_SQUARE]  20.01,59.98 0 top
U$12  FATSQUARE_GROUP  [FAT_SQUARE]  140.01,59.98 0 top
U$14  FATSQUARE_GROUP  [FAT_SQUARE]  20.01,99.98 0 top
U$16  FATSQUARE_GROUP  [FAT_SQUARE]  60.01,99.98 0 top
U$19  FATFAN_GROUP  [FAT_FAN]  100.01,99.98 0 top
U$21  FATFAN_GROUP  [FAT_FAN]  140.01,99.98 0 top
U$23  FATFAN_GROUP  [FAT_FAN]  20.01,139.98 0 top
U$25  FATFAN_GROUP  [FAT_FAN]  60.01,139.98 0 top
U$27  FATFAN_GROUP  [FAT_FAN]  100.01,139.98 0 top
U$29  FATFAN_GROUP  [FAT_FAN]  140.01,139.98 0 top
U$31  FATFAN_GROUP  [FAT_FAN]  20.01,179.98 0 top
U$33  FATFAN_GROUP  [FAT_FAN]  60.01,179.98 0 top
U$35  FATFAN_GROUP  [FAT_FAN]  100.01,179.98 0 top
U$37  FATFAN_GROUP  [FAT_FAN]  140.01,179.98 0 top

## Library data of the parts
C2 C4-C6 C8-C10 C12 C14 C16 C19 C21 C23 C25 C27 C29 C31 C33 C35 C37 R5-R8 R13-R24 R29-R40 R45-R48 R53-R56 R61-R64 R73-R76 R81-R84 R89-R92 R97-R100 R105-R108 R113-R116 R121-R124 R129-R132 R137-R140 R145-R148 = resistor
PAD8 PAD11-PAD18 PAD28-PAD54 PAD64-PAD90 PAD100-PAD108 PAD118-PAD126 PAD136-PAD144 PAD165-PAD174 PAD185-PAD194 PAD205-PAD214 PAD225-PAD234 PAD245-PAD254 PAD265-PAD274 PAD285-PAD294 PAD305-PAD314 PAD325-PAD334 PAD345-PAD354 = wirepad
U2 U4-U6 U8-U10 U12 U14 U16 U19 U21 U23 U25 U27 U29 U31 U33 U35 U37 = LDC1614
U$1 U$4-U$6 U$8-U$10 U$12 U$14 U$16 U$19 U$21 U$23 U$25 U$27 U$29 U$31 U$33 U$35 U$37 = coils

## Nets
ADDR1: R7.1 R8.2 U2.ADDR
ADDR3: R15.1 R16.2 U4.ADDR
ADDR4: R19.1 R20.2 U5.ADDR
ADDR5: R23.1 R24.2 U6.ADDR
ADDR7: R31.1 R32.2 U8.ADDR
ADDR8: R35.1 R36.2 U9.ADDR
ADDR9: R39.1 R40.2 U10.ADDR
ADDR11: R47.1 R48.2 U12.ADDR
ADDR13: R55.1 R56.2 U14.ADDR
ADDR15: R63.1 R64.2 U16.ADDR
ADDR18: R75.1 R76.2 U19.ADDR
ADDR20: R83.1 R84.2 U21.ADDR
ADDR22: R91.1 R92.2 U23.ADDR
ADDR24: R99.1 R100.2 U25.ADDR
ADDR26: R107.1 R108.2 U27.ADDR
ADDR28: R115.1 R116.2 U29.ADDR
ADDR30: R123.1 R124.2 U31.ADDR
ADDR32: R131.1 R132.2 U33.ADDR
ADDR34: R139.1 R140.2 U35.ADDR
ADDR36: R147.1 R148.2 U37.ADDR
GND: C2.2 C4.2 C5.2 C6.2 C8.2 C9.2 C10.2 C12.2 C14.2 C16.2 C19.2 C21.2 C23.2 C25.2 C27.2 C29.2 C31.2 C33.2 C35.2 C37.2 PAD11.1 PAD16.1 PAD29.1 PAD34.1 PAD38.1 PAD43.1 PAD47.1 PAD52.1 PAD65.1 PAD70.1 PAD74.1 PAD79.1 PAD83.1 PAD88.1 PAD101.1 PAD106.1 PAD119.1 PAD124.1 PAD137.1 PAD142.1 PAD166.1 PAD171.1 PAD186.1 PAD191.1 PAD206.1 PAD211.1 PAD226.1 PAD231.1 PAD246.1 PAD251.1 PAD266.1 PAD271.1 PAD286.1 PAD291.1 PAD306.1 PAD311.1 PAD326.1 PAD331.1 PAD346.1 PAD351.1 R8.1 R16.1 R20.1 R24.1 R32.1 R36.1 R40.1 R48.1 R56.1 R64.1 R76.1 R84.1 R92.1 R100.1 R108.1 R116.1 R124.1 R132.1 R140.1 R148.1 U2.CLIKIN U2.DAP U2.GND U2.SD U4.CLIKIN U4.DAP U4.GND U4.SD U5.CLIKIN U5.DAP U5.GND U5.SD U6.CLIKIN U6.DAP U6.GND U6.SD U8.CLIKIN U8.DAP U8.GND U8.SD U9.CLIKIN U9.DAP U9.GND U9.SD U10.CLIKIN U10.DAP U10.GND U10.SD U12.CLIKIN U12.DAP U12.GND U12.SD U14.CLIKIN U14.DAP U14.GND U14.SD U16.CLIKIN U16.DAP U16.GND U16.SD U19.CLIKIN U19.DAP U19.GND U19.SD U21.CLIKIN U21.DAP U21.GND U21.SD U23.CLIKIN U23.DAP U23.GND U23.SD U25.CLIKIN U25.DAP U25.GND U25.SD U27.CLIKIN U27.DAP U27.GND U27.SD U29.CLIKIN U29.DAP U29.GND U29.SD U31.CLIKIN U31.DAP U31.GND U31.SD U33.CLIKIN U33.DAP U33.GND U33.SD U35.CLIKIN U35.DAP U35.GND U35.SD U37.CLIKIN U37.DAP U37.GND U37.SD
INTRPT1: PAD12.1 U2.INTB
INTRPT3: PAD30.1 U4.INTB
INTRPT4: PAD39.1 U5.INTB
INTRPT5: PAD48.1 U6.INTB
INTRPT7: PAD66.1 U8.INTB
INTRPT8: PAD75.1 U9.INTB
INTRPT9: PAD84.1 U10.INTB
INTRPT11: PAD102.1 U12.INTB
INTRPT13: PAD120.1 U14.INTB
INTRPT15: PAD138.1 U16.INTB
INTRPT18: PAD167.1 PAD172.1 U19.INTB
INTRPT20: PAD187.1 PAD192.1 U21.INTB
INTRPT22: PAD207.1 PAD212.1 U23.INTB
INTRPT24: PAD227.1 PAD232.1 U25.INTB
INTRPT26: PAD247.1 PAD252.1 U27.INTB
INTRPT28: PAD267.1 PAD272.1 U29.INTB
INTRPT30: PAD287.1 PAD292.1 U31.INTB
INTRPT32: PAD307.1 PAD312.1 U33.INTB
INTRPT34: PAD327.1 PAD332.1 U35.INTB
INTRPT36: PAD347.1 PAD352.1 U37.INTB
N$1: U2.IN1B U$1.EXITCOIL0
N$2: U2.IN0A U$1.INCOIL1
N$3: U2.IN0B U$1.EXITCOIL1
N$4: U2.IN2A U$1.EXITCOIL2
N$5: U2.IN2B U$1.INCOIL2
N$14: U2.IN3A U$1.INCOIL3
N$15: U2.IN3B U$1.EXITCOIL3
N$16: U2.IN1A U$1.INCOIL0
N$25: U4.IN1B U$4.EXITCOIL0
N$26: U4.IN0A U$4.INCOIL1
N$27: U4.IN0B U$4.EXITCOIL1
N$28: U4.IN2A U$4.EXITCOIL2
N$29: U4.IN2B U$4.INCOIL2
N$30: U4.IN3A U$4.INCOIL3
N$31: U4.IN3B U$4.EXITCOIL3
N$32: U4.IN1A U$4.INCOIL0
N$33: U5.IN1B U$5.EXITCOIL0
N$34: U5.IN0A U$5.INCOIL1
N$35: U5.IN0B U$5.EXITCOIL1
N$36: U5.IN2A U$5.EXITCOIL2
N$37: U5.IN2B U$5.INCOIL2
N$38: U5.IN3A U$5.INCOIL3
N$39: U5.IN3B U$5.EXITCOIL3
N$40: U5.IN1A U$5.INCOIL0
N$41: U6.IN1B U$6.EXITCOIL0
N$42: U6.IN0A U$6.INCOIL1
N$43: U6.IN0B U$6.EXITCOIL1
N$44: U6.IN2A U$6.EXITCOIL2
N$45: U6.IN2B U$6.INCOIL2
N$46: U6.IN3A U$6.INCOIL3
N$47: U6.IN3B U$6.EXITCOIL3
N$48: U6.IN1A U$6.INCOIL0
N$57: U8.IN1B U$8.EXITCOIL0
N$58: U8.IN0A U$8.INCOIL1
N$59: U8.IN0B U$8.EXITCOIL1
N$60: U8.IN2A U$8.EXITCOIL2
N$61: U8.IN2B U$8.INCOIL2
N$62: U8.IN3A U$8.INCOIL3
N$63: U8.IN3B U$8.EXITCOIL3
N$64: U8.IN1A U$8.INCOIL0
N$65: U9.IN1B U$9.EXITCOIL0
N$66: U9.IN0A U$9.INCOIL1
N$67: U9.IN0B U$9.EXITCOIL1
N$68: U9.IN2A U$9.EXITCOIL2
N$69: U9.IN2B U$9.INCOIL2
N$70: U9.IN3A U$9.INCOIL3
N$71: U9.IN3B U$9.EXITCOIL3
N$72: U9.IN1A U$9.INCOIL0
N$73: U10.IN1B U$10.EXITCOIL0
N$74: U10.IN0A U$10.INCOIL1
N$75: U10.IN0B U$10.EXITCOIL1
N$76: U10.IN2A U$10.EXITCOIL2
N$77: U10.IN2B U$10.INCOIL2
N$78: U10.IN3A U$10.INCOIL3
N$79: U10.IN3B U$10.EXITCOIL3
N$80: U10.IN1A U$10.INCOIL0
N$89: U12.IN1B U$12.EXITCOIL0
N$90: U12.IN0A U$12.INCOIL1
N$91: U12.IN0B U$12.EXITCOIL1
N$92: U12.IN2A U$12.EXITCOIL2
N$93: U12.IN2B U$12.INCOIL2
N$94: U12.IN3A U$12.INCOIL3
N$95: U12.IN3B U$12.EXITCOIL3
N$96: U12.IN1A U$12.INCOIL0
N$105: U14.IN1B U$14.EXITCOIL0
N$106: U14.IN0A U$14.INCOIL1
N$107: U14.IN0B U$14.EXITCOIL1
N$108: U14.IN2A U$14.EXITCOIL2
N$109: U14.IN2B U$14.INCOIL2
N$110: U14.IN3A U$14.INCOIL3
N$111: U14.IN3B U$14.EXITCOIL3
N$112: U14.IN1A U$14.INCOIL0
N$121: U16.IN1B U$16.EXITCOIL0
N$122: U16.IN0A U$16.INCOIL1
N$123: U16.IN0B U$16.EXITCOIL1
N$124: U16.IN2A U$16.EXITCOIL2
N$125: U16.IN2B U$16.INCOIL2
N$126: U16.IN3A U$16.INCOIL3
N$127: U16.IN3B U$16.EXITCOIL3
N$128: U16.IN1A U$16.INCOIL0
N$145: U19.IN1B U$19.EXITCOIL0
N$146: U19.IN0A U$19.INCOIL1
N$147: U19.IN0B U$19.EXITCOIL1
N$148: U19.IN2A U$19.EXITCOIL2B
N$149: U19.IN2B U$19.INCOIL2B
N$150: U19.IN3A U$19.INCOIL3
N$151: U19.IN3B U$19.EXITCOIL3
N$152: U19.IN1A U$19.INCOIL0
N$161: U21.IN1B U$21.EXITCOIL0
N$162: U21.IN0A U$21.INCOIL1
N$163: U21.IN0B U$21.EXITCOIL1
N$164: U21.IN2A U$21.EXITCOIL2B
N$165: U21.IN2B U$21.INCOIL2B
N$166: U21.IN3A U$21.INCOIL3
N$167: U21.IN3B U$21.EXITCOIL3
N$168: U21.IN1A U$21.INCOIL0
N$177: U23.IN1B U$23.EXITCOIL0
N$178: U23.IN0A U$23.INCOIL1
N$179: U23.IN0B U$23.EXITCOIL1
N$180: U23.IN2A U$23.EXITCOIL2B
N$181: U23.IN2B U$23.INCOIL2B
N$182: U23.IN3A U$23.INCOIL3
N$183: U23.IN3B U$23.EXITCOIL3
N$184: U23.IN1A U$23.INCOIL0
N$193: U25.IN1B U$25.EXITCOIL0
N$194: U25.IN0A U$25.INCOIL1
N$195: U25.IN0B U$25.EXITCOIL1
N$196: U25.IN2A U$25.EXITCOIL2B
N$197: U25.IN2B U$25.INCOIL2B
N$198: U25.IN3A U$25.INCOIL3
N$199: U25.IN3B U$25.EXITCOIL3
N$200: U25.IN1A U$25.INCOIL0
N$209: U27.IN1B U$27.EXITCOIL0
N$210: U27.IN0A U$27.INCOIL1
N$211: U27.IN0B U$27.EXITCOIL1
N$212: U27.IN2A U$27.EXITCOIL2B
N$213: U27.IN2B U$27.INCOIL2B
N$214: U27.IN3A U$27.INCOIL3
N$215: U27.IN3B U$27.EXITCOIL3
N$216: U27.IN1A U$27.INCOIL0
N$225: U29.IN1B U$29.EXITCOIL0
N$226: U29.IN0A U$29.INCOIL1
N$227: U29.IN0B U$29.EXITCOIL1
N$228: U29.IN2A U$29.EXITCOIL2B
N$229: U29.IN2B U$29.INCOIL2B
N$230: U29.IN3A U$29.INCOIL3
N$231: U29.IN3B U$29.EXITCOIL3
N$232: U29.IN1A U$29.INCOIL0
N$241: U31.IN1B U$31.EXITCOIL0
N$242: U31.IN0A U$31.INCOIL1
N$243: U31.IN0B U$31.EXITCOIL1
N$244: U31.IN2A U$31.EXITCOIL2B
N$245: U31.IN2B U$31.INCOIL2B
N$246: U31.IN3A U$31.INCOIL3
N$247: U31.IN3B U$31.EXITCOIL3
N$248: U31.IN1A U$31.INCOIL0
N$257: U33.IN1B U$33.EXITCOIL0
N$258: U33.IN0A U$33.INCOIL1
N$259: U33.IN0B U$33.EXITCOIL1
N$260: U33.IN2A U$33.EXITCOIL2B
N$261: U33.IN2B U$33.INCOIL2B
N$262: U33.IN3A U$33.INCOIL3
N$263: U33.IN3B U$33.EXITCOIL3
N$264: U33.IN1A U$33.INCOIL0
N$273: U35.IN1B U$35.EXITCOIL0
N$274: U35.IN0A U$35.INCOIL1
N$275: U35.IN0B U$35.EXITCOIL1
N$276: U35.IN2A U$35.EXITCOIL2B
N$277: U35.IN2B U$35.INCOIL2B
N$278: U35.IN3A U$35.INCOIL3
N$279: U35.IN3B U$35.EXITCOIL3
N$280: U35.IN1A U$35.INCOIL0
N$289: U37.IN1B U$37.EXITCOIL0
N$290: U37.IN0A U$37.INCOIL1
N$291: U37.IN0B U$37.EXITCOIL1
N$292: U37.IN2A U$37.EXITCOIL2B
N$293: U37.IN2B U$37.INCOIL2B
N$294: U37.IN3A U$37.INCOIL3
N$295: U37.IN3B U$37.EXITCOIL3
N$296: U37.IN1A U$37.INCOIL0
SCL1: PAD14.1 PAD18.1 R5.1 U2.SCL
SCL3: PAD32.1 PAD36.1 R13.1 U4.SCL
SCL4: PAD41.1 PAD45.1 R17.1 U5.SCL
SCL5: PAD50.1 PAD54.1 R21.1 U6.SCL
SCL7: PAD68.1 PAD72.1 R29.1 U8.SCL
SCL8: PAD77.1 PAD81.1 R33.1 U9.SCL
SCL9: PAD86.1 PAD90.1 R37.1 U10.SCL
SCL11: PAD104.1 PAD108.1 R45.1 U12.SCL
SCL13: PAD122.1 PAD126.1 R53.1 U14.SCL
SCL15: PAD140.1 PAD144.1 R61.1 U16.SCL
SCL18: PAD169.1 PAD174.1 R73.1 U19.SCL
SCL20: PAD189.1 PAD194.1 R81.1 U21.SCL
SCL22: PAD209.1 PAD214.1 R89.1 U23.SCL
SCL24: PAD229.1 PAD234.1 R97.1 U25.SCL
SCL26: PAD249.1 PAD254.1 R105.1 U27.SCL
SCL28: PAD269.1 PAD274.1 R113.1 U29.SCL
SCL30: PAD289.1 PAD294.1 R121.1 U31.SCL
SCL32: PAD309.1 PAD314.1 R129.1 U33.SCL
SCL34: PAD329.1 PAD334.1 R137.1 U35.SCL
SCL36: PAD349.1 PAD354.1 R145.1 U37.SCL
SDA1: PAD13.1 PAD17.1 R6.1 U2.SDA
SDA3: PAD31.1 PAD35.1 R14.1 U4.SDA
SDA4: PAD40.1 PAD44.1 R18.1 U5.SDA
SDA5: PAD49.1 PAD53.1 R22.1 U6.SDA
SDA7: PAD67.1 PAD71.1 R30.1 U8.SDA
SDA8: PAD76.1 PAD80.1 R34.1 U9.SDA
SDA9: PAD85.1 PAD89.1 R38.1 U10.SDA
SDA11: PAD103.1 PAD107.1 R46.1 U12.SDA
SDA13: PAD121.1 PAD125.1 R54.1 U14.SDA
SDA15: PAD139.1 PAD143.1 R62.1 U16.SDA
SDA18: PAD168.1 PAD173.1 R74.1 U19.SDA
SDA20: PAD188.1 PAD193.1 R82.1 U21.SDA
SDA22: PAD208.1 PAD213.1 R90.1 U23.SDA
SDA24: PAD228.1 PAD233.1 R98.1 U25.SDA
SDA26: PAD248.1 PAD253.1 R106.1 U27.SDA
SDA28: PAD268.1 PAD273.1 R114.1 U29.SDA
SDA30: PAD288.1 PAD293.1 R122.1 U31.SDA
SDA32: PAD308.1 PAD313.1 R130.1 U33.SDA
SDA34: PAD328.1 PAD333.1 R138.1 U35.SDA
SDA36: PAD348.1 PAD353.1 R146.1 U37.SDA
VDD: C2.1 C4.1 C5.1 C6.1 C8.1 C9.1 C10.1 C12.1 C14.1 C16.1 C19.1 C21.1 C23.1 C25.1 C27.1 C29.1 C31.1 C33.1 C35.1 C37.1 PAD8.1 PAD15.1 PAD28.1 PAD33.1 PAD37.1 PAD42.1 PAD46.1 PAD51.1 PAD64.1 PAD69.1 PAD73.1 PAD78.1 PAD82.1 PAD87.1 PAD100.1 PAD105.1 PAD118.1 PAD123.1 PAD136.1 PAD141.1 PAD165.1 PAD170.1 PAD185.1 PAD190.1 PAD205.1 PAD210.1 PAD225.1 PAD230.1 PAD245.1 PAD250.1 PAD265.1 PAD270.1 PAD285.1 PAD290.1 PAD305.1 PAD310.1 PAD325.1 PAD330.1 PAD345.1 PAD350.1 R5.2 R6.2 R7.2 R13.2 R14.2 R15.2 R17.2 R18.2 R19.2 R21.2 R22.2 R23.2 R29.2 R30.2 R31.2 R33.2 R34.2 R35.2 R37.2 R38.2 R39.2 R45.2 R46.2 R47.2 R53.2 R54.2 R55.2 R61.2 R62.2 R63.2 R73.2 R74.2 R75.2 R81.2 R82.2 R83.2 R89.2 R90.2 R91.2 R97.2 R98.2 R99.2 R105.2 R106.2 R107.2 R113.2 R114.2 R115.2 R121.2 R122.2 R123.2 R129.2 R130.2 R131.2 R137.2 R138.2 R139.2 R145.2 R146.2 R147.2 U2.VDD U4.VDD U5.VDD U6.VDD U8.VDD U9.VDD U10.VDD U12.VDD U14.VDD U16.VDD U19.VDD U21.VDD U23.VDD U25.VDD U27.VDD U29.VDD U31.VDD U33.VDD U35.VDD U37.VDD

## Tracks (layer width: path | path; a pad name or v marks a point on that pad's centre or on a via)
ADDR1  (3 unrouted)
  Bottom 0.125: R7.1 20.99,16.96 | 20.99,16.96 R8.2 | U2.ADDR 20.82,17.13 20.99,16.96
ADDR3  (3 unrouted)
  Bottom 0.125: R15.1 60.99,16.96 | 60.99,16.96 R16.2 | U4.ADDR 60.82,17.13 60.99,16.96
ADDR4  (3 unrouted)
  Bottom 0.125: R19.1 60.99,56.96 | 60.99,56.96 R20.2 | U5.ADDR 60.82,57.13 60.99,56.96
ADDR5  (3 unrouted)
  Bottom 0.125: R23.1 100.99,16.96 | 100.99,16.96 R24.2 | U6.ADDR 100.82,17.13 100.99,16.96
ADDR7  (3 unrouted)
  Bottom 0.125: R31.1 140.99,16.96 | 140.99,16.96 R32.2 | U8.ADDR 140.82,17.13 140.99,16.96
ADDR8  (3 unrouted)
  Bottom 0.125: R35.1 100.99,56.96 | 100.99,56.96 R36.2 | U9.ADDR 100.82,57.13 100.99,56.96
ADDR9  (3 unrouted)
  Bottom 0.125: R39.1 20.99,56.96 | 20.99,56.96 R40.2 | U10.ADDR 20.82,57.13 20.99,56.96
ADDR11  (3 unrouted)
  Bottom 0.125: R47.1 140.99,56.96 | 140.99,56.96 R48.2 | U12.ADDR 140.82,57.13 140.99,56.96
ADDR13  (3 unrouted)
  Bottom 0.125: R55.1 20.99,96.96 | 20.99,96.96 R56.2 | U14.ADDR 20.82,97.13 20.99,96.96
ADDR15  (3 unrouted)
  Bottom 0.125: R63.1 60.99,96.96 | 60.99,96.96 R64.2 | U16.ADDR 60.82,97.13 60.99,96.96
ADDR18  (3 unrouted)
  Bottom 0.125: R75.1 100.99,96.96 | 100.99,96.96 R76.2 | U19.ADDR 100.82,97.13 100.99,96.96
ADDR20  (3 unrouted)
  Bottom 0.125: R83.1 140.99,96.96 | 140.99,96.96 R84.2 | U21.ADDR 140.82,97.13 140.99,96.96
ADDR22  (3 unrouted)
  Bottom 0.125: R91.1 20.99,136.96 | 20.99,136.96 R92.2 | U23.ADDR 20.82,137.13 20.99,136.96
ADDR24  (3 unrouted)
  Bottom 0.125: R99.1 60.99,136.96 | 60.99,136.96 R100.2 | U25.ADDR 60.82,137.13 60.99,136.96
ADDR26  (3 unrouted)
  Bottom 0.125: R107.1 100.99,136.96 | 100.99,136.96 R108.2 | U27.ADDR 100.82,137.13 100.99,136.96
ADDR28  (3 unrouted)
  Bottom 0.125: R115.1 140.99,136.96 | 140.99,136.96 R116.2 | U29.ADDR 140.82,137.13 140.99,136.96
ADDR30  (3 unrouted)
  Bottom 0.125: R123.1 20.99,176.96 | 20.99,176.96 R124.2 | U31.ADDR 20.82,177.13 20.99,176.96
ADDR32  (3 unrouted)
  Bottom 0.125: R131.1 60.99,176.96 | 60.99,176.96 R132.2 | U33.ADDR 60.82,177.13 60.99,176.96
ADDR34  (3 unrouted)
  Bottom 0.125: R139.1 100.99,176.96 | 100.99,176.96 R140.2 | U35.ADDR 100.82,177.13 100.99,176.96
ADDR36  (3 unrouted)
  Bottom 0.125: R147.1 140.99,176.96 | 140.99,176.96 R148.2 | U37.ADDR 140.82,177.13 140.99,176.96
GND  (via drill 0.2, 0.2 pad 0.1)  (79 unrouted)
  Top 0.25: v17.45,26.68 15.92,26.68 15.47,27.13 v15.43,27.13 | v57.45,26.68 55.92,26.68 55.47,27.13 v55.43,27.13 | v97.45,26.68 95.92,26.68 95.47,27.13 v95.43,27.13 | v137.45,26.68 135.92,26.68 135.47,27.13 v135.43,27.13 | v17.45,66.68 15.92,66.68 15.47,67.13 v15.43,67.13 | v57.45,66.68 55.92,66.68 55.47,67.13 v55.43,67.13 | v97.45,66.68 95.92,66.68 95.47,67.13 v95.43,67.13 | v137.45,66.68 135.92,66.68 135.47,67.13 v135.43,67.13 | v17.45,106.68 15.92,106.68 15.47,107.13 v15.43,107.13 | v57.45,106.68 55.92,106.68 55.47,107.13 v55.43,107.13 | v95.14,106.68 v95.15,106.68 95.28,106.55 97.32,106.55 v97.45,106.68 | v135.14,106.68 v135.15,106.68 135.28,106.55 137.32,106.55 v137.45,106.68 | v15.14,146.68 v15.15,146.68 15.28,146.55 17.32,146.55 v17.45,146.68 | v55.14,146.68 v55.15,146.68 55.28,146.55 57.32,146.55 v57.45,146.68 | v95.14,146.68 v95.15,146.68 95.28,146.55 97.32,146.55 v97.45,146.68 | v135.14,146.68 v135.15,146.68 135.28,146.55 137.32,146.55 v137.45,146.68 | v15.14,186.68 v15.15,186.68 15.28,186.55 17.32,186.55 v17.45,186.68 | v55.14,186.68 v55.15,186.68 55.28,186.55 57.32,186.55 v57.45,186.68 | v95.14,186.68 v95.15,186.68 95.28,186.55 97.32,186.55 v97.45,186.68 | v135.14,186.68 v135.15,186.68 135.28,186.55 137.32,186.55 v137.45,186.68
  Bottom 0.125: PAD11.1 14.01,13.59 | R8.1 21.35,18.29 U2.CLIKIN | PAD29.1 54.01,13.59 | R16.1 61.35,18.29 U4.CLIKIN | PAD47.1 94.01,13.59 | R24.1 101.35,18.29 U6.CLIKIN | PAD65.1 134.01,13.59 | R32.1 141.35,18.29 U8.CLIKIN | PAD83.1 14.01,53.59 | R40.1 21.35,58.29 U10.CLIKIN | PAD38.1 54.01,53.59 | R20.1 61.35,58.29 U5.CLIKIN | PAD74.1 94.01,53.59 | R36.1 101.35,58.29 U9.CLIKIN | PAD101.1 134.01,53.59 | R48.1 141.35,58.29 U12.CLIKIN | PAD119.1 14.01,93.59 | R56.1 21.35,98.29 U14.CLIKIN | PAD137.1 54.01,93.59 | R64.1 61.35,98.29 U16.CLIKIN | PAD166.1 94.01,93.59 | R76.1 101.35,98.29 U19.CLIKIN | PAD186.1 134.01,93.59 | R84.1 141.35,98.29 U21.CLIKIN | PAD206.1 14.01,133.59 | R92.1 21.35,138.29 U23.CLIKIN | PAD226.1 54.01,133.59 | R100.1 61.35,138.29 U25.CLIKIN | PAD246.1 94.01,133.59 | R108.1 101.35,138.29 U27.CLIKIN | PAD266.1 134.01,133.59 | R116.1 141.35,138.29 U29.CLIKIN | PAD286.1 14.01,173.59 | R124.1 21.35,178.29 U31.CLIKIN | PAD306.1 54.01,173.59 | R132.1 61.35,178.29 U33.CLIKIN | PAD326.1 94.01,173.59 | R140.1 101.35,178.29 U35.CLIKIN | PAD346.1 134.01,173.59 | R148.1 141.35,178.29 U37.CLIKIN
  Bottom 0.25: 20.01,19.63 U2.DAP | 20.01,18.39 20.01,19.32 | 20.01,19.32 U2.DAP | U2.DAP 18.95,19.98 U2.GND | U2.CLIKIN 20.01,19.63 | 20.01,19.63 U2.DAP | PAD11.1 14.01,14.74 | U2.DAP 20.01,21.57 17.76,23.82 | 17.76,23.82 17.78,23.84 | PAD11.1 | v17.45,26.68 17.45,24.13 17.76,23.82 | 17.53,18.56 16.54,18.56 14.34,16.36 14.34,14.31 PAD11.1 | U2.SD 19.7,19.32 20.01,19.32 | C2.2 17.53,18.56 | 17.53,18.56 U2.GND | U2.GND | v15.42,27.12 v15.43,27.13 14.38,27.13 14.01,26.76 PAD16.1 | 60.01,19.63 U4.DAP | 60.01,18.39 60.01,19.32 | 60.01,19.32 U4.DAP | U4.DAP 58.95,19.98 U4.GND | U4.CLIKIN 60.01,19.63 | 60.01,19.63 U4.DAP | PAD29.1 54.01,14.74 | U4.DAP 60.01,21.57 57.76,23.82 | 57.76,23.82 57.78,23.84 | PAD29.1 | v57.45,26.68 57.45,24.13 57.76,23.82 | 57.53,18.56 56.54,18.56 54.34,16.36 54.34,14.31 PAD29.1 | U4.SD 59.7,19.32 60.01,19.32 | C4.2 57.53,18.56 | 57.53,18.56 U4.GND | U4.GND | v55.42,27.12 v55.43,27.13 54.38,27.13 54.01,26.76 PAD34.1 | 100.01,19.63 U6.DAP | 100.01,18.39 100.01,19.32 | 100.01,19.32 U6.DAP | U6.DAP 98.95,19.98 U6.GND | U6.CLIKIN 100.01,19.63 | 100.01,19.63 U6.DAP | PAD47.1 94.01,14.74 | U6.DAP 100.01,21.57 97.76,23.82 | 97.76,23.82 97.78,23.84 | PAD47.1 | v97.45,26.68 97.45,24.13 97.76,23.82 | 97.53,18.56 96.54,18.56 94.34,16.36 94.34,14.31 PAD47.1 | U6.SD 99.7,19.32 100.01,19.32 | C6.2 97.53,18.56 | 97.53,18.56 U6.GND | U6.GND | v95.42,27.12 v95.43,27.13 94.38,27.13 94.01,26.76 PAD52.1 | 140.01,19.63 U8.DAP | 140.01,18.39 140.01,19.32 | 140.01,19.32 U8.DAP | U8.DAP 138.95,19.98 U8.GND | U8.CLIKIN 140.01,19.63 | 140.01,19.63 U8.DAP | PAD65.1 134.01,14.74 | U8.DAP 140.01,21.57 137.76,23.82 | 137.76,23.82 137.78,23.84 | PAD65.1 | v137.45,26.68 137.45,24.13 137.76,23.82
  Bottom 0.25: 137.53,18.56 136.54,18.56 134.34,16.36 134.34,14.31 PAD65.1 | U8.SD 139.7,19.32 140.01,19.32 | C8.2 137.53,18.56 | 137.53,18.56 U8.GND | U8.GND | v135.42,27.12 v135.43,27.13 134.38,27.13 134.01,26.76 PAD70.1 | 20.01,59.63 U10.DAP | 20.01,58.39 20.01,59.32 | 20.01,59.32 U10.DAP | U10.DAP 18.95,59.98 U10.GND | U10.CLIKIN 20.01,59.63 | 20.01,59.63 U10.DAP | PAD83.1 14.01,54.74 | U10.DAP 20.01,61.57 17.76,63.82 | 17.76,63.82 17.78,63.84 | PAD83.1 | v17.45,66.68 17.45,64.13 17.76,63.82 | 17.53,58.56 16.54,58.56 14.34,56.36 14.34,54.31 PAD83.1 | U10.SD 19.7,59.32 20.01,59.32 | C10.2 17.53,58.56 | 17.53,58.56 U10.GND | U10.GND | v15.42,67.12 v15.43,67.13 14.38,67.13 14.01,66.76 PAD88.1 | 60.01,59.63 U5.DAP | 60.01,58.39 60.01,59.32 | 60.01,59.32 U5.DAP | U5.DAP 58.95,59.98 U5.GND | U5.CLIKIN 60.01,59.63 | 60.01,59.63 U5.DAP | PAD38.1 54.01,54.74 | U5.DAP 60.01,61.57 57.76,63.82 | 57.76,63.82 57.78,63.84 | PAD38.1 | v57.45,66.68 57.45,64.13 57.76,63.82 | 57.53,58.56 56.54,58.56 54.34,56.36 54.34,54.31 PAD38.1 | U5.SD 59.7,59.32 60.01,59.32 | C5.2 57.53,58.56 | 57.53,58.56 U5.GND | U5.GND | v55.42,67.12 v55.43,67.13 54.38,67.13 54.01,66.76 PAD43.1 | 100.01,59.63 U9.DAP | 100.01,58.39 100.01,59.32 | 100.01,59.32 U9.DAP | U9.DAP 98.95,59.98 U9.GND | U9.CLIKIN 100.01,59.63 | 100.01,59.63 U9.DAP | PAD74.1 94.01,54.74 | U9.DAP 100.01,61.57 97.76,63.82 | 97.76,63.82 97.78,63.84 | PAD74.1 | v97.45,66.68 97.45,64.13 97.76,63.82 | 97.53,58.56 96.54,58.56 94.34,56.36 94.34,54.31 PAD74.1 | U9.SD 99.7,59.32 100.01,59.32 | C9.2 97.53,58.56 | 97.53,58.56 U9.GND | U9.GND | v95.42,67.12 v95.43,67.13 94.38,67.13 94.01,66.76 PAD79.1 | 140.01,59.63 U12.DAP | 140.01,58.39 140.01,59.32